# EAGLE board lupa300b (EAGLE 7.1.0)
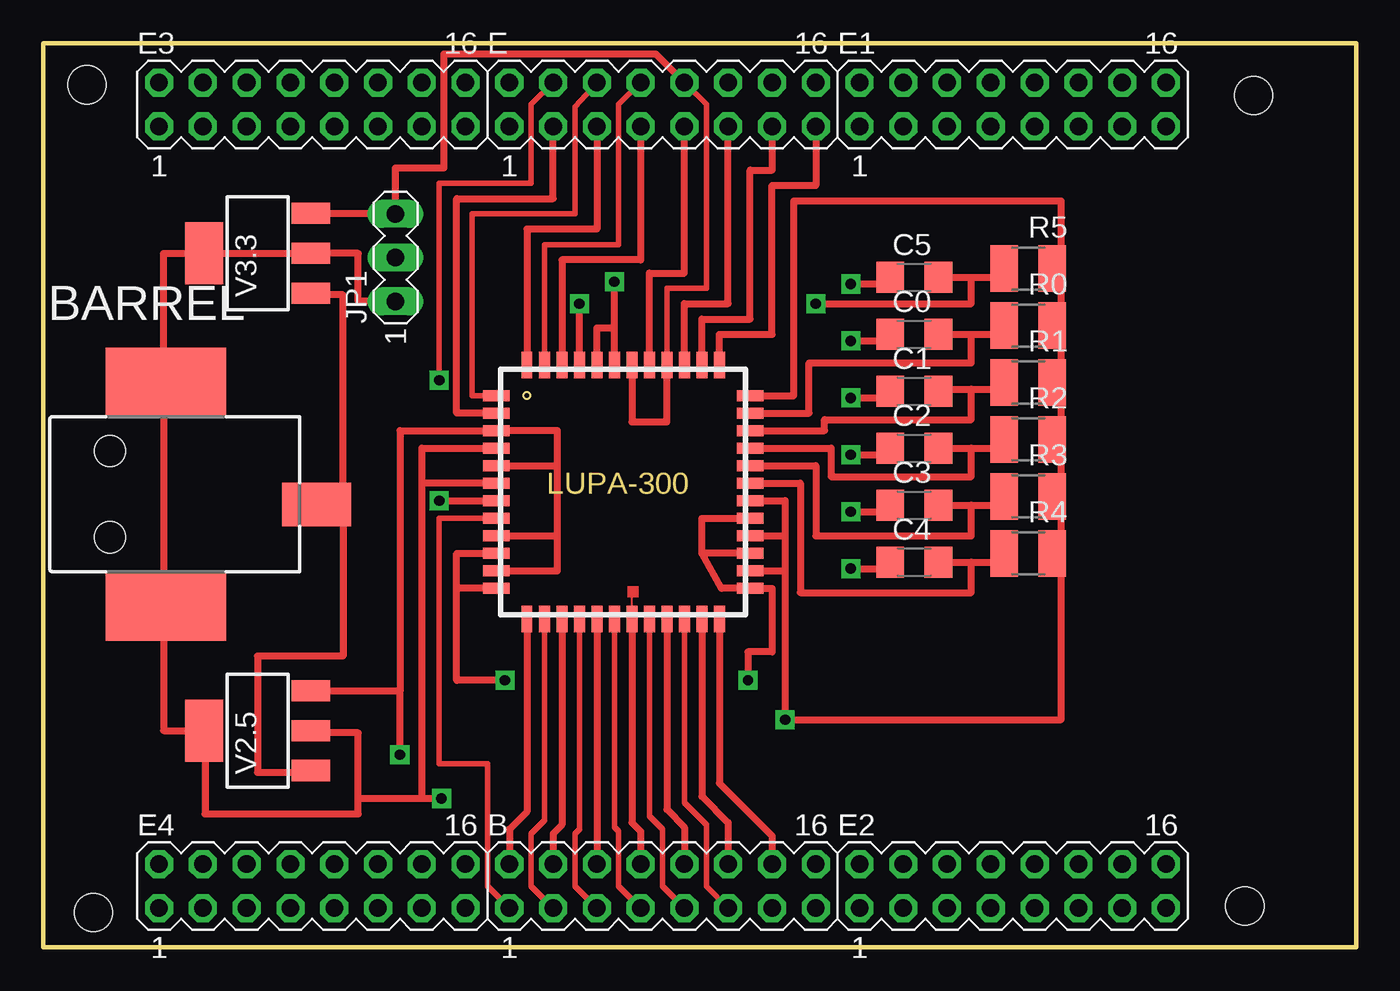
[diagram p0: board, top side]
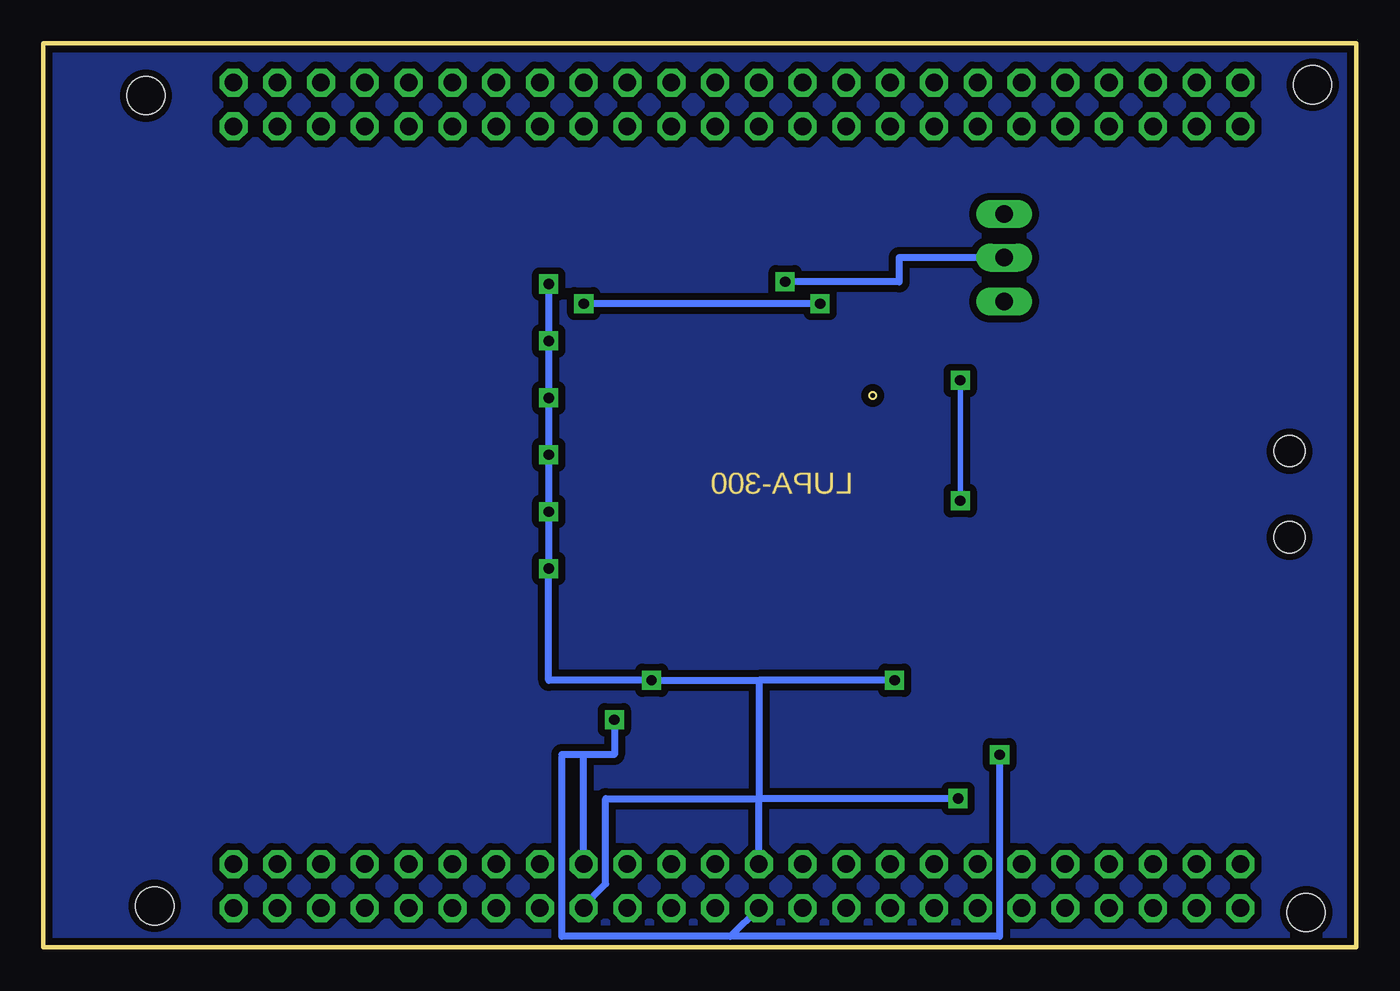
[diagram p1: board, bottom side, seen from below]

Size 76.2 x 52.45 mm. Coordinates in mm from the lower left corner, seen from the top.
Outline: 76.2,0 76.2,52.45 0,52.45 0,0 76.2,0
Copper layers (1*16): Top 0.035mm / dielectric 1.5mm / Bottom 0.035mm
Design rules "SparkFun *": minimum track width 8mil, minimum drill 20mil, track to track 8mil, track to pad 8mil, pad to pad 8mil, via to via 8mil, smd to smd 8mil, copper to edge 10mil, drill to drill 8mil, minimum pad ring 12mil, minimum via ring 10mil, stop-mask expansion 4mil, vias tented up to drill 25mil, thermal gap 10mil
Holes 2.2 mm at 70.23,49.4 2.54,50.04 2.92,2.03 69.72,2.41

## Footprints (pad centres in the part's own frame; a part is rotated, then mirrored left to right if it is on the bottom)
MA08-2 = drill 1.016 octagon: 1 -8.89,-1.27; 2 -8.89,1.27; 3 -6.35,-1.27; 4 -6.35,1.27; 5 -3.81,-1.27; 6 -3.81,1.27; 7 -1.27,-1.27; 8 -1.27,1.27; 9 1.27,-1.27; 10 1.27,1.27; 11 3.81,-1.27; 12 3.81,1.27; 13 6.35,-1.27; 14 6.35,1.27; 15 8.89,-1.27; 16 8.89,1.27
694106105102 = smd 4 x 2.5: 1 15.5,-0.6 | smd 7 x 4: 2 6.75,6.5; 3 6.75,-6.5 | hole 1.8: 3.5,2.5; 3.5,-2.5
C3216 = smd 1.6 x 1.8: 1 -1.4,0; 2 1.4,0
LUPA300 = smd 1.524 x 0.635: P$1 -0.254,1.524; P$2 -0.254,2.54; P$3 -0.254,3.556; P$4 -0.254,4.572; P$5 -0.254,5.588; P$6 -0.254,6.604; P$7 -0.254,7.62; P$8 -0.254,8.636; P$9 -0.254,9.652; P$10 -0.254,10.668; P$11 -0.254,11.684; P$12 -0.254,12.7; P$13 14.478,12.7; P$14 14.478,11.684; P$15 14.478,10.668; P$16 14.478,9.652; P$17 14.478,8.636; P$18 14.478,7.62; P$19 14.478,6.604; P$20 14.478,5.588; P$21 14.478,4.572; P$22 14.478,3.556; P$23 14.478,2.54; P$24 14.478,1.524 | smd 0.635 x 1.524: P$25 1.524,-0.254; P$26 2.54,-0.254; P$27 3.556,-0.254; P$28 4.572,-0.254; P$29 5.588,-0.254; P$30 6.604,-0.254; P$31 7.62,-0.254; P$32 8.636,-0.254; P$33 9.652,-0.254; P$34 10.668,-0.254; P$35 11.684,-0.254; P$36 12.7,-0.254; P$37 1.524,14.478; P$38 2.54,14.478; P$39 3.556,14.478; P$40 4.572,14.478; P$41 5.588,14.478; P$42 6.604,14.478; P$43 7.62,14.478; P$44 8.636,14.478; P$45 9.652,14.478; P$46 10.668,14.478; P$47 11.684,14.478; P$48 12.7,14.478
MA03-1 = drill 1.016 long: 1 -2.54,0; 2 0,0; 3 2.54,0
R1210 = smd 1.6 x 2.7: 1 -1.4,0; 2 1.4,0
SOT223 = smd 1.219 x 2.235: 1 -2.311,-3.099; 2 0,-3.099; 3 2.311,-3.099 | smd 3.6 x 2.2: 4 0,3.099

## Placement (x,y rotation side)
B  [MA08-2]  35.94,3.56 0 top
BARREL  [694106105102]  0.38,26.29 0 top
C0  [C3216]  50.55,35.56 0 top
C1  [C3216]  50.55,32.26 0 top
C2  [C3216]  50.55,28.96 0 top
C3  [C3216]  50.55,25.65 0 top
C4  [C3216]  50.55,22.35 0 top
C5  [C3216]  50.55,38.86 0 top
E  [MA08-2]  35.94,48.89 0 top
E1  [MA08-2]  56.26,48.89 0 top
E2  [MA08-2]  56.26,3.56 0 top
E3  [MA08-2]  15.62,48.89 0 top
E4  [MA08-2]  15.62,3.56 0 top
E$1  [LUPA300]  26.54,19.3 0 top
JP1  [MA03-1]  20.45,40.01 90 top
R0  [R1210]  57.15,36.07 0 top
R1  [R1210]  57.15,32.77 0 top
R2  [R1210]  57.15,29.46 0 top
R3  [R1210]  57.15,26.16 0 top
R4  [R1210]  57.15,22.86 0 top
R5  [R1210]  57.15,39.37 0 top
V2.5  [SOT223]  12.45,12.57 90 top
V3.3  [SOT223]  12.45,40.26 90 top

## Library data of the parts
B E E1-E4 JP1 = con-lstb
BARREL = Wurth_Elektronik_Electromechanic_DC_Power_Jack_Connectors_rev15c
C0 C1-C5 = rcl
E$1 = lupa300
R0 R1-R5 = resistor
V2.5 V3.3 = transistor-pnp

## Nets
S$1: E.4
S$3: B.9
S$4: B.10
S$5: B.11
S$7: B.12
S$8: B.14
S$9: B.6
S$10: B.5
S$12: B.4
S$15: B.16
S$17: B.8
S$25: E.11
S$26: E.15
S$31: E.6
S$33: E.7
S$34: E.8
S$35: E.5
S$40: B.3
S$41: B.2
S$44: JP1.2
S$46: E.10 JP1.3
S$47: E.13
S$50: JP1.1
S$56: B.1
S$63: B.7

## Tracks (layer width: path | path; a pad name or v marks a point on that pad's centre or on a via)
S$1  (via drill 0.6)
  Top 0.305: v22.99,32.89 22.99,44.32 28.32,44.32 28.32,48.89 E.4
  Top 0.406: v22.99,25.91 25.78,25.91
  Bottom 0.305: v22.99,32.89 v22.99,25.91
S$2
  Top 0.406: 17.4,24.89 17.4,16.89 12.45,16.89 12.45,10.16 14.99,10.16
S$3
  Top 0.305: 35.18,18.67 35.18,7.62 35.94,6.86 35.94,3.56 B.9
S$4
  Top 0.406: 36.2,18.54 36.2,8 37.21,6.99 B.10
S$5
  Top 0.305: 37.21,18.54 37.21,8.38 38.48,7.11 38.48,3.56 B.11
S$6
  Top 0.406: 41.53,30.99 44.45,30.99 44.45,33.91 53.85,33.91 53.85,35.56 | 52.58,35.56 53.85,35.56 | 53.85,35.56 55.25,35.56
S$7
  Top 0.406: 38.23,18.67 38.23,8.76 39.75,7.24 B.12
S$8
  Top 0.406: 39.24,18.67 39.24,9.52 42.29,6.48 B.14
S$9
  Top 0.406: 32.13,18.54 B.6
S$10
  Top 0.305: 31.11,18.54 31.11,6.86 30.86,6.6 30.86,3.56 B.5
S$11
  Top 0.406: 41.4,29.97 45.34,29.97 45.34,30.61 53.85,30.61 53.85,32.38 | 52.58,32.38 53.85,32.38 | 53.85,32.38 55.25,32.38
S$12
  Top 0.406: 30.1,18.54 30.1,7.11 29.59,6.6 B.4
S$13
  Top 0.406: 41.4,26.92 43.94,26.92 43.94,20.57 53.85,20.57 53.85,22.35 | 52.45,22.35 53.85,22.35 | 53.85,22.35 55.25,22.35
S$14
  Top 0.406: 40.77,20.83 39.37,20.83 38.23,22.86 | 38.23,22.86 38.23,24.89 40.64,24.89 | 40.77,22.86 38.23,22.86
S$15  (via drill 0.6)
  Top 0.406: 41.28,23.88 43.05,23.88 | 43.05,23.88 43.05,21.84 | 41.4,25.91 43.05,25.91 43.05,23.88 | 41.28,21.84 43.05,21.84 | 41.4,32 43.56,32 43.56,43.31 59.05,43.31 59.05,13.21 v43.05,13.21 43.05,21.84
  Bottom 0.406: v43.05,13.21 43.05,11.18 44.83,11.18 | 44.83,11.18 46.1,11.18 | B.16 44.83,11.18
S$16
  Top 0.406: 41.4,28.96 45.72,28.96 45.72,27.3 53.85,27.3 53.85,28.96 | 52.58,28.96 53.85,28.96 | 53.85,28.96 55.25,28.96
S$17  (via drill 0.6)
  Top 0.406: 41.4,20.83 42.29,20.83 42.29,17.14 40.89,17.14 v40.89,15.49 | 34.16,18.67 34.16,7.24 34.67,6.73 B.8 | v46.86,38.48 48.64,38.48 | v46.86,21.97 48.64,21.97 | 26.04,20.83 24,20.83 | 24,20.83 24,22.86 26.04,22.86 | v26.8,15.49 24,15.49 24,20.83 | 9.4,11.3 9.4,7.75 18.29,7.75 18.29,8.64 | 21.97,26.92 21.97,28.96 25.91,28.96 | 21.97,26.92 21.97,8.64 | 21.97,8.64 21.84,8.64 18.29,8.64 | 18.29,8.64 18.29,12.45 16.13,12.45 | 25.91,26.92 21.97,26.92 | v23.11,8.64 21.97,8.64
  Bottom 0.406: v46.86,38.48 v46.86,21.97 46.86,15.49 v40.89,15.49 34.67,15.49 | 44.96,2.29 43.56,3.68 43.56,8.64 34.67,8.64 | v26.8,15.49 34.67,15.49 | B.8 34.67,8.64 | 34.67,15.49 34.67,8.64 | v23.11,8.64 34.67,8.64
S$18
  Top 0.406: 17.4,26.67 17.4,37.85 16.38,37.85
S$19
  Top 0.406: 41.4,27.94 44.83,27.94 44.83,23.88 53.85,23.88 53.85,25.65 | 52.45,25.65 53.85,25.65 | 53.85,25.65 55.25,25.65
S$22
  Top 0.406: 26.04,30.99 24,30.99 24,43.43 29.59,43.43 29.59,47.5
S$24
  Top 0.406: 26.67,21.84 29.84,21.84 29.84,29.97 26.92,29.97
S$25
  Top 0.406: 37.21,34.16 37.21,37.34 39.75,37.34 E.11
S$26
  Top 0.406: 39.24,34.04 39.24,35.56 42.29,35.56 42.29,44.2 44.83,44.2 E.15
S$27  (via drill 0.6)
  Top 0.406: v46.86,25.27 48.64,25.27
S$29
  Top 0.406: 26.42,27.94 29.84,27.94
S$30
  Top 0.406: 34.16,33.27 34.16,30.48 36.2,30.48 36.2,33.4
S$31
  Top 0.305: 25.91,32 24.89,32 24.89,42.55 30.86,42.55 30.86,48.77 E.6
S$32  (via drill 0.6)
  Top 0.406: v46.86,28.57 48.64,28.57
S$33
  Top 0.406: E.7 34.67,39.88 30.1,39.88 30.1,34.04
S$34
  Top 0.305: 29.08,34.29 29.08,40.77 33.4,40.77 33.4,48.89 E.8
S$35
  Top 0.406: E.5 32.13,41.66 28.07,41.66 28.07,34.04
S$36
  Top 0.406: 10.16,40.26 14.86,40.26
S$37
  Top 0.406: 6.98,32.13 6.98,12.57 9.14,12.57
S$38  (via drill 0.6)
  Top 0.406: v46.86,31.88 48.64,31.88
S$39
  Top 0.406: 6.98,34.42 6.98,40.26 8.64,40.26
S$40
  Top 0.305: 29.08,18.54 29.08,7.37 28.32,6.6 28.32,3.56 B.3
S$41
  Top 0.406: 28.07,18.54 28.07,7.87 27.05,6.86 B.2
S$42  (via drill 0.6)
  Top 0.406: v46.86,35.18 48.64,35.18
S$44  (via drill 0.6)
  Top 0.406: 33.15,34.16 33.15,35.94 | 33.15,35.94 v33.15,38.61 | 33.15,35.94 32.13,35.94 32.13,34.16
  Bottom 0.406: JP1.2 26.54,40.01 26.54,38.61 v33.15,38.61
S$45
  Top 0.406: 35.18,34.04 35.18,39.12 37.21,39.12 37.21,47.62
S$46
  Top 0.305: 36.2,34.16 36.2,38.23 38.48,38.23 38.48,48.89 E.10
  Top 0.406: 15.88,42.55 JP1.3 20.45,45.21 23.24,45.21 23.24,51.82 35.56,51.82 E.10
S$47
  Top 0.406: 38.23,34.16 38.23,36.45 41.02,36.45 41.02,45.09 42.29,45.09 E.13
S$50
  Top 0.406: JP1.1 18.29,37.46 18.29,40.26 16,40.26
S$51
  Top 0.406: 26.8,23.88 29.84,23.88
S$54  (via drill 0.6)
  Top 0.406: 52.45,38.86 53.85,38.86 | 53.85,38.86 55.25,38.86 | 53.85,38.86 53.85,37.34 v44.83,37.34 | 31.11,34.16 v31.11,37.34
  Bottom 0.406: v31.11,37.34 v44.83,37.34
S$56
  Top 0.305: 25.91,24.89 22.99,24.89 22.99,10.67 25.78,10.67 25.78,3.56 B.1
S$62
  pour Bottom (isolate 0.406): 0,52.32 76.2,52.45 76.2,0 0,0
S$63  (via drill 0.6)
  Top 0.305: 33.15,18.54 33.15,6.99 33.4,6.73 33.4,3.56 B.7
  Top 0.406: 20.7,14.86 20.7,29.97 26.04,29.97 | 20.7,14.86 16.26,14.86 | v20.7,11.18 20.7,14.86
  Bottom 0.406: B.7 36.32,0.64 | 36.32,0.64 46.1,0.64 46.1,11.05 | v20.7,11.18 20.7,0.64 36.32,0.64